# Altium PCB featherULP-2.PcbDoc
Units mm, origin at the board's own origin, x right, y up, seen from the top; angles counter-clockwise.
Board outline 50.04 x 22.86 mm, 2 copper layers (Top Layer, Bottom Layer); 20 components, 27 nets, 105 pads, 24 vias.
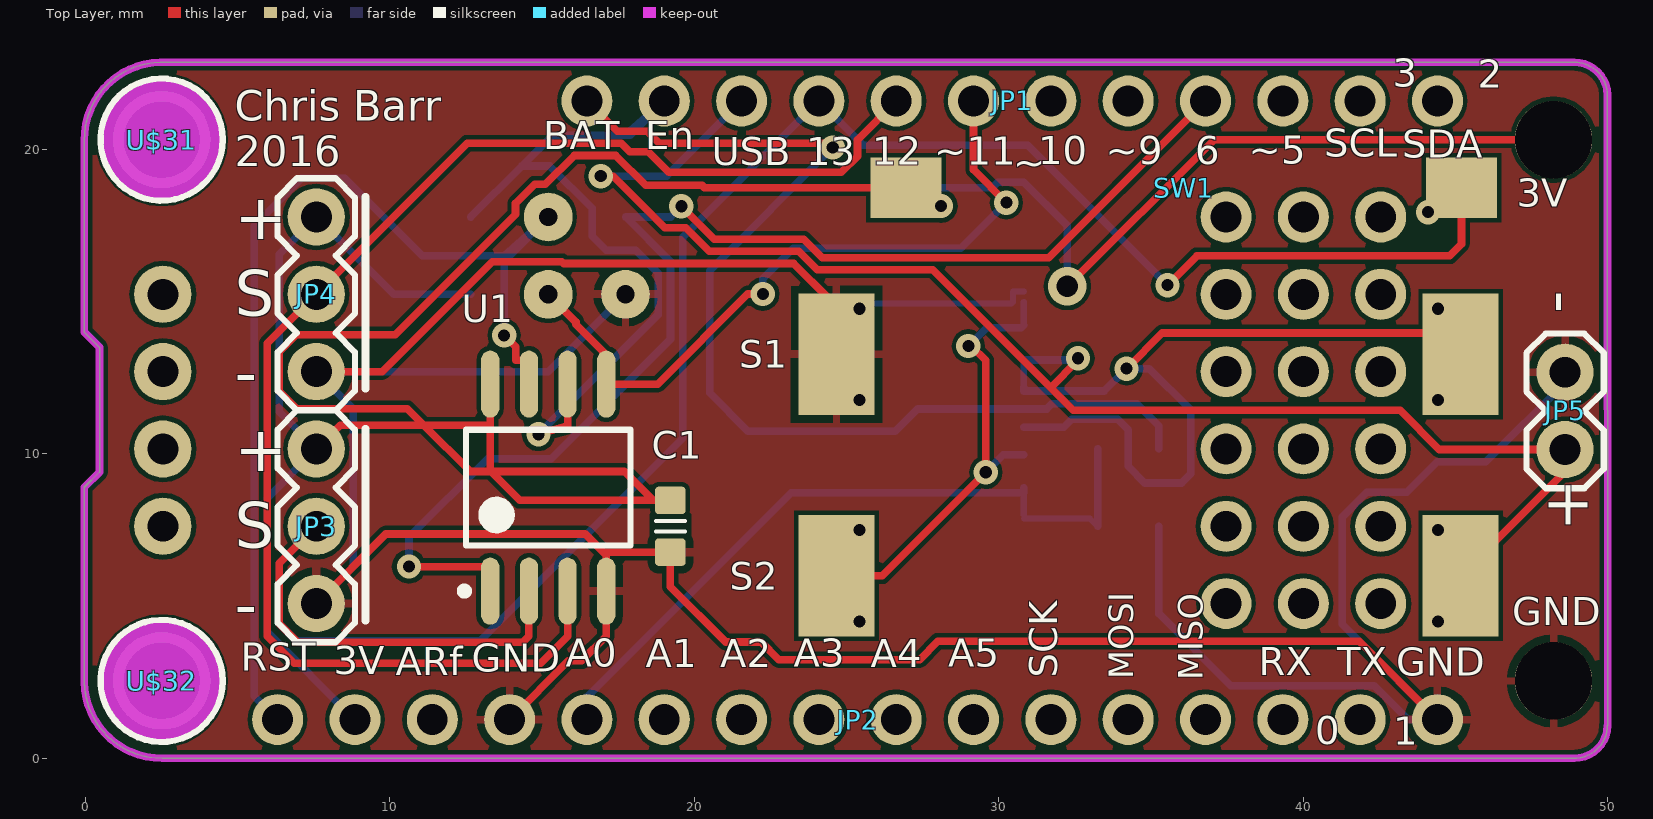
[diagram p0: Top Layer view]
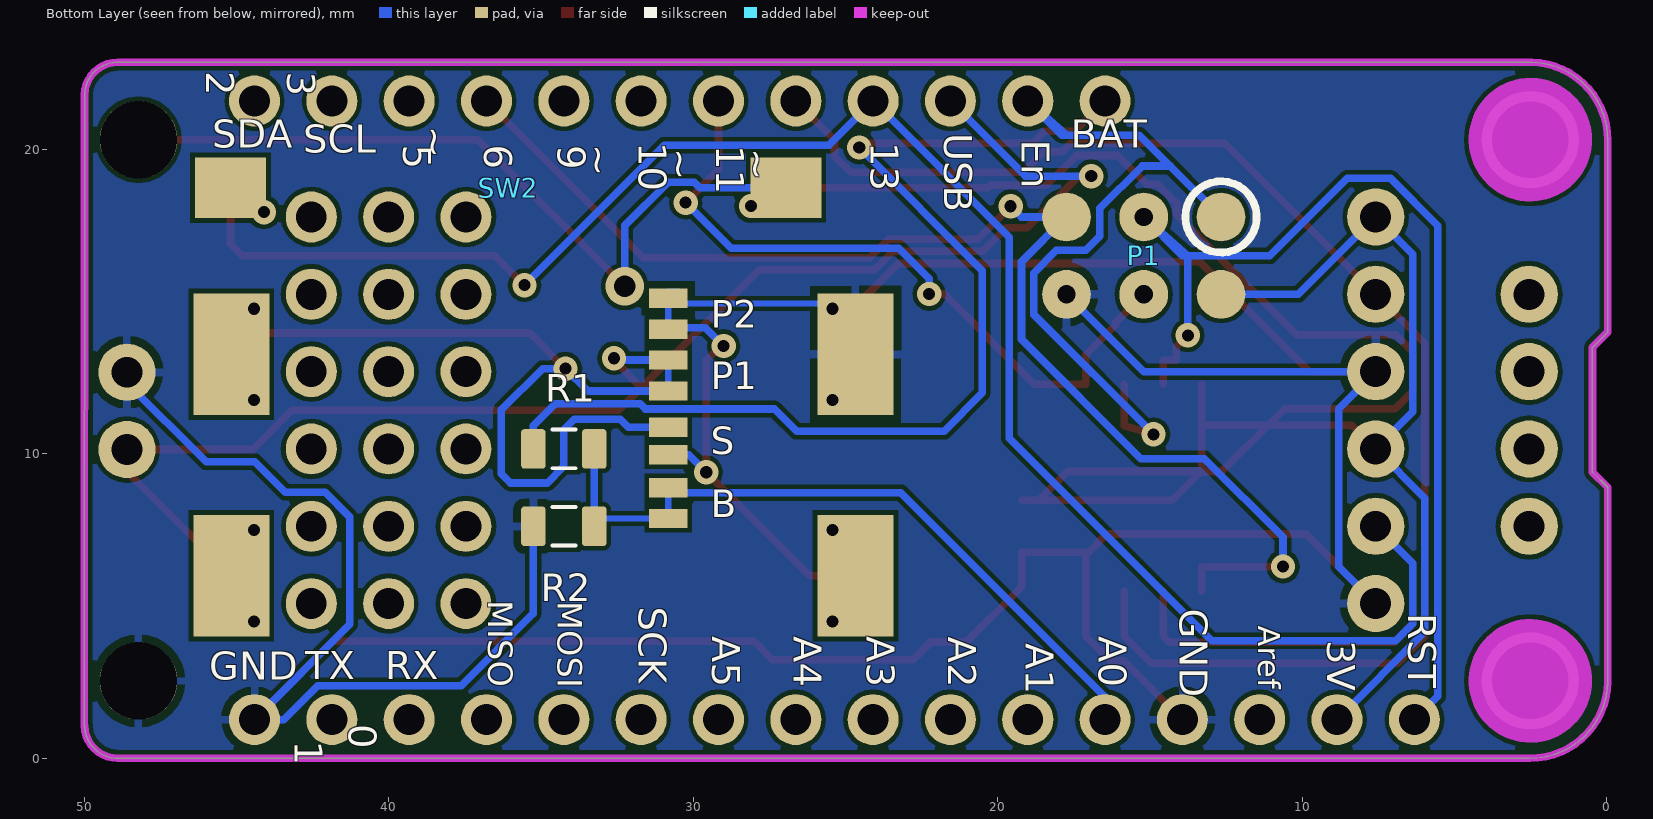
[diagram p1: Bottom Layer view, seen from below]

## Layer stack, top to bottom
Top Solder: solder mask 0.0102, Solder Resist, Dk 3.5
Top Layer: signal copper 0.0356
Dielectric1: dielectric 0.32, FR-4, Dk 4.8
Bottom Layer: signal copper 0.0356
Bottom Solder: solder mask 0.0102, Solder Resist, Dk 3.5

## Board outline
-0.04,2.501 -0.04,8.9 0.46,9.4 0.46,13.5 -0.04,14 -0.04,20.3 cw(c2.5,20.32) 2.461,22.86 48.9,22.86 cw(c48.909,21.774) 49.994,21.791 50,1.069 49.994,1.069 cw(c48.909,1.086) 48.9,0 2.52,0 cw(c2.5,2.54)

## Design rules (kind name [scope] priority, off if disabled: settings)
Clearance [All] p1: gap=0.15
FabricationTestPointUsage TestPointUsage [All] p1: valid=0 allowmultiple=FALSE
FabricationTestpoint Testpoint [All] p1: side=3 testpointundercomponent=TRUE minsize=1.016 maxsize=2.54 preferedsize=1.524 minholesize=0 maxholesize=1.016 preferedholesize=0.813 testpointgrid=0.025 allowsidetop=TRUE allowsidebottom=TRUE usegrid=TRUE gridtolerance=0
HoleSize [All] p1: absolutevalues=TRUE maxlimit=3.5 minlimit=0.025 maxpercent=80.000 minpercent=20.000
PolygonConnect [All] p1: connectstyle=Relief reliefconductorwidth=0.254 reliefentries=4 polygonreliefangle="90 Angle" airgapwidth=0.254
RoutingVias [All] p1: holewidth=0.4 width=0.8 viastyle="Through Hole" minholewidth=0.25 minwidth=0.5 maxholewidth=1 maxwidth=1.4
SilkToSolderMaskClearance SilkscreenOverComponentPads [IsPad] p1: minsilkscreentomaskgap=0.254 clearancetoexposedcopper=TRUE
SolderMaskExpansion [All] p1: expansion=0.102
Width [All] p1: maxlimit=1 minlimit=0.2 preferedwidth=0.25
26 further rules are at their usual default settings.

## Components (designator, comment, footprint, x,y, rotation, side; value= is the part's Value field where it differs from the comment)
B "JUMPER-PAD-2-NC_BY_TRACENO_SILK" PAD-JUMPER-2-NC_BY_TRACE_NO_SILK#1 30.821,8.382 r90 bottom (schematic designator BAT_MON)
C1 "approved sub OK" CAPC1608X90N 19.21,7.62 r270 top
JP1 "HEADER-1X12" 1X12_ROUND 30.44,21.59 r0 top
JP2 "HEADER-1X16ROUND" 1X16_ROUND 25.36,1.27 r180 top
JP3 "Header 3Standard 3-pin 0.1\" header. Use with straight break away headers (SKU : PRT-00116), right angle break away headers (PRT-00553), swiss pins (PRT-00743), machine pins (PRT-00117), and female headers (PRT-00115). Molex polarized connector foot print use with SKU : PRT-08232 with associated crimp pins and housings." 1X03 7.58,5.08 r90 top
JP4 "Header 3Standard 3-pin 0.1\" header. Use with straight break away headers (SKU : PRT-00116), right angle break away headers (PRT-00553), swiss pins (PRT-00743), machine pins (PRT-00117), and female headers (PRT-00115). Molex polarized connector foot print use with SKU : PRT-08232 with associated crimp pins and housings." 1X03 7.58,12.7 r90 top
JP5 "Standard 2-pin 0.1\" header. Use with  - straight break away headers ( PRT-00116) - right angle break away headers (PRT-00553) - swiss pins (PRT-00743) - machine pins (PRT-00117) - female headers (PRT-00115)   Molex polarized connector foot print use with: PRT-08233 with associated crimp pins and housings.  2.54_SCREWTERM for use with  PRT-10571.  3.5mm Screw Terminal footprints for  PRT-08084  5mm Screw Terminal footprints for use with PRT-08432" 1X02 48.6,10.14 r90 top
P1 "ICSP" "ICSP Pads - SMD" 12.66,17.78 r270 bottom
P1 "JUMPER-PAD-2-NC_BY_TRACENO_SILK" PAD-JUMPER-2-NC_BY_TRACE_NO_SILK#2 30.821,12.573 r90 bottom (schematic designator PARALLEL1)
P2 "JUMPER-PAD-2-NC_BY_TRACENO_SILK" PAD-JUMPER-2-NC_BY_TRACE_NO_SILK#2 30.821,14.605 r90 bottom (schematic designator PARALLEL2)
R1 "Thick Film" RESC2012X70N 34.25,10.16 r180 bottom
R2 "Thick Film" RESC2012X70N 34.25,7.62 r0 bottom
S "JUMPER-PAD-2-NO" PAD-JUMPER-2-NO_NO_SILK 30.821,10.414 r90 bottom (schematic designator SERIES)
S1 "Solar Cell" "SOLAR CELL IXYS  KXOB22-01X8L-ND" 45.172,13.267 r180 top
S2 "Solar Cell" "SOLAR CELL IXYS  KXOB22-01X8L-ND" 45.172,5.993 r180 top
SW1 "Reed Switch" "Reed Switch MDSM-4" 45.2,18.74 r180 top
SW2 "Reed Switch" "Reed Switch MDSM-4" 45.2,18.74 r180 bottom
U1 "ATtiny45-20SH" 8S2_N 15.2,8.89 r90 top
U$31 "MOUNTINGHOLE2.5" MOUNTINGHOLE_2.5_PLATED 2.5,20.32 r270 top
U$32 "MOUNTINGHOLE2.5" MOUNTINGHOLE_2.5_PLATED 2.5,2.54 r270 top

## Footprints (in the part's own frame and the unit in brackets; to place one, negate y for a bottom-side part, rotate by r counter-clockwise, add the part's x,y. Pads: shape width x height; smd on the part's side, far side on the other; paste and mask are expansions set on the pad)
1X02 [mil]
  round 74 hole 40: 1(0,0) 2(100,0)
  silkscreen extent -50,-50 150,50
1X03 [mil]
  round 74 hole 40: 1(0,0) 2(100,0) 3(200,0)
  silkscreen extent -50,-50 250,50
1X12_ROUND [mil] "1X12_ROUND"
  round 66 hole 40: 1(-550,0) 2(-450,0) 3(-350,0) 4(-250,0) 5(-150,0) 6(-50,0) 7(50,0) 8(150,0) 9(250,0) 10(350,0) 11(450,0) 12(550,0)
1X16_ROUND [mil] "1X16_ROUND"
  round 66 hole 40: 1(-750,0) 2(-650,0) 3(-550,0) 4(-450,0) 5(-350,0) 6(-250,0) 7(-150,0) 8(-50,0) 9(50,0) 10(150,0) 11(250,0) 12(350,0) 13(450,0) 14(550,0) 15(650,0) 16(750,0)
8S2_N [mm] "SOP, 8-Leads, Body 5.3x5.3mm, Pitch 1.27mm, IPC Medium Density"
  oval 2.2x0.6 smd: 1(-3.4,1.905) 2(-3.4,0.635) 3(-3.4,-0.635) 4(-3.4,-1.905) 5(3.4,-1.905) 6(3.4,-0.635) 7(3.4,0.635) 8(3.4,1.905)
  silkscreen extent -3.52,-2.7 1.9,2.88, body extent -2.7,-2.68 2.7,2.68, height 2.16
CAPC1608X90N [mm] "Chip Capacitor, Body 1.6x0.8mm, EIA 0603, IPC Medium Density"
  round 0.254 on Mech15: 0(0,0)
  rrect25% 0.9x1 smd: 1(-0.85,0) 2(0.85,0)
  Top Layer pour cut-out: -0.6,0.5 -0.4,0.7 0.4,0.7 0.6,0.5 0.6,-0.5 0.4,-0.7 -0.4,-0.7 -0.6,-0.5
  silkscreen extent -0.18,-0.48 0.18,0.48, body extent -0.85,-0.45 0.85,0.45, height 0.89
"ICSP Pads - SMD" [mm]
  round 1.6 smd: 1(0,0) 2(2.54,0) 5(0,-5.08)
  round 1.6 hole 0.6: 3(0,-2.54) 4(2.54,-2.54) 6(2.54,-5.08)
  silkscreen extent -1.17,-1.17 1.17,1.17
MOUNTINGHOLE_2.5_PLATED [mil] "MOUNTINGHOLE_2.5_PLATED"
  round 126 hole 99: P$1(0,0)
  Top Layer keep-out circle w80: c0,0 r40
  Bottom Layer keep-out circle w80: c0,0 r40
  silkscreen extent -79,-79 79,79
PAD-JUMPER-2-NC_BY_TRACE_NO_SILK#1 [mil]
  rect 25x50 smd: 1(-20,0) 2(20,0)
  Top Layer lines w8: -15,0 13.3,0 15,0
PAD-JUMPER-2-NC_BY_TRACE_NO_SILK#2 [mil]
  rect 25x50 smd: 1(-20,0) 2(20,0)
  Top Layer lines w8: -15,0 15,0
PAD-JUMPER-2-NO_NO_SILK [mm]
  rect 0.635x1.27 smd: 1(-0.45,0) 2(0.457,0)
"Reed Switch MDSM-4" [mm]
  rect 2.34x2 smd: 0(0,0) 1(18.25,0)
RESC2012X70N [mm] "Chip Resistor, Body 2.0x1.2mm, EIA 0805, IPC Medium Density"
  round 0.254 on Mech15: 0(0,0)
  rrect25% 0.8x1.3 smd: 1(-1,0) 2(1,0)
  Top Layer pour cut-out: -0.725,0.65 -0.525,0.85 0.525,0.85 0.725,0.65 0.725,-0.65 0.525,-0.85 -0.525,-0.85 -0.725,-0.65
  silkscreen extent -0.38,-0.64 0.38,0.64, body extent -1.1,-0.67 1.1,0.68, height 0.69
"SOLAR CELL IXYS  KXOB22-01X8L-ND" [mm]
  rect 2.5x4 smd far side: +(0,0) -(20.5,0)
  rect 2.5x4 smd: +(0,0) -(20.5,0)
  body extent -0.75,-3.5 21.25,3.5, height 1.5

## Part data
C1: library part CAPC_100n_0603_X7R_50V_10%, "Capacitor SMD Cer 100nF 10% 50V X7R 0603"
JP2: "PIN HEADER"
JP3 JP4: library part M03PTH
JP5: library part M02PTH
P1: library part "Header 3X2", "Header, 3-Pin, Dual row"
R1: library part RES_1M_0805_5%, "Resistor SMD chip 1M Ohm 0.125W 5% 0805"
R2: library part RES_205K_0805_1%, "Resistor SMD chip 205k Ohm 0.125W 1% 0805"
U1: "8-bit AVR Microcontroller, 20MHz, 2.7-5.5V, 4K Flash, 256 Bytes EEPROM, 256 Bytes SRAM, Industrial Grade (-40°C to 85°C), 8-Lead SOIC, Pb-Free"
U$31 U$32: "Mounting Hole   For #2 screws (0.086\"/2.18mm width, 0.094\"/2.4mm hole) use 2.5mm"

## Free pads (board coordinates)
  round 2.54 hole 2.54: 1(48.22,2.54) 1(48.22,20.32)
  round 1.88 hole 1.016: ""(2.54,7.62) ""(2.54,10.16) ""(2.54,12.7) ""(2.54,15.24)
  round 1.676 hole 1.016: ""(37.465,5.08) ""(37.465,7.62) ""(37.465,10.16) ""(37.465,12.7) ""(37.465,15.24) ""(37.465,17.78) ""(40.005,5.08) ""(40.005,7.62) ""(40.005,10.16) ""(40.005,12.7) ""(40.005,15.24) ""(40.005,17.78) ""(42.545,5.08) ""(42.545,7.62) ""(42.545,10.16) ""(42.545,12.7) ""(42.545,15.24) ""(42.545,17.78)

## Via types
v1: diameter 0.8, hole 0.4, Top Layer to Bottom Layer, tented both sides, 21 vias
v2: diameter 0.8, hole 0.4, Top Layer to Bottom Layer, 2 vias
v3: diameter 1.27, hole 0.711, Top Layer to Bottom Layer, 1 vias

## Nets (pads, with @x,y where several pads share a name; then routed paths per layer and width w, separated by ;. In a path a pad name is that pad's centre, name@x,y a point inside that pad or via, vN(x,y) a via of type N, cw(c..) or ccw(c..) an arc to the next point about the centre after c; other vN are vias at no path point)
0: JP2.3
1: JP2.2
2: JP1.12
3: JP1.11
5: JP1.10
6: JP1.9 P1.5 U1.1 | length 42.4
  Top Layer w0.25: v1(10.625,6.296) 13.295,6.296 U1.1 ; v1(19.572,18.132) 20.654,17.05 23.59,17.05 24.2,16.44 31.64,16.44 JP1.9
  Bottom Layer w0.25: v1(10.625,6.296) 10.625,7.261 13.207,9.843 15.293,9.843 19.215,13.765 19.215,16.305 P1.5 19.22,17.78 v1(19.572,18.132)
9: JP1.8
10: JP1.7
11: JP1.6 P1.4 U1.5 | length 23.4
  Top Layer w0.25: P1.4 16.111,14.329 16.111,14.25 17.105,13.256 U1.5 18.79,12.29 21.75,15.25 v2(22.25,15.25) ; JP1.6 29.17,19.33 v2(30.25,18.25)
  Bottom Layer w0.25: v2(22.25,15.25) 22.25,15.75 23.25,16.75 28.75,16.75 v2(30.25,18.25)
12: JP1.5 JP4.2 U1.3 | length 46.8
  Top Layer w0.25: U1.3 15.835,4.01 14.946,3.121 6.854,3.121 5.965,4.01 5.965,13.625 JP4.2 12.538,20.198 17.602,20.198 17.873,19.927 18.48,19.927 19.165,19.243 24.823,19.243 25.36,19.779 25.36,20.32 JP1.5
13: JP1.4 JP3.2 SW1.0 SW2.0 U1.2 | length 72.6
  Top Layer w0.25: JP3.2 6.365,6.405 6.365,4.416 6.975,3.807 14.362,3.807 14.565,4.01 U1.2 ; v1(35.542,15.542) 36.511,16.51 44.816,16.51 45.2,16.894 SW1.0
  Bottom Layer w0.25: JP3.2 6.365,6.405 6.365,4.416 6.916,3.865 12.968,3.865 19.615,10.512 19.615,17.115 JP1.4 25.54,20.14 30.944,20.14 v1(35.542,15.542)
  other v1: 44.1,17.94
+3V3: C1.1 JP2.15 JP3.3 JP4.3 P1.2@12.66,15.24 pad.1@48.22,20.32 SW1.1 SW2.1 U1.8 | length 105.6
  Top Layer w0.25: JP3.3 8.364,10.944 11.107,10.944 ; U1.8 13.295,10.944 ; C1.1 18.651,8.47 ; SW1.1 20.33,18.74 20.251,18.818 18.397,18.818 17.417,19.798 16.048,19.798 15.105,18.855 14.755,18.855 14.125,18.225 14.125,17.875 10.166,13.916 6.924,13.916 6.365,13.357 6.365,12.054 6.942,11.478 10.574,11.478 11.107,10.944 ; v3(32.25,15.5) 37.07,20.32 pad.1@48.22,20.32 ; 11.107,10.944 13.295,10.944 ; 11.107,10.944 12.631,9.42 13.295,9.42 ; 13.295,9.42 13.295,9.432 ; 13.295,9.42 13.307,9.42 ; 13.295,9.432 13.295,10.944 ; 13.295,9.432 13.307,9.42 ; 13.307,9.42 14.257,8.47 18.651,8.47 ; 13.307,9.42 17.701,9.42 18.651,8.47
  Bottom Layer w0.25: JP2.15 5.965,4.155 5.965,8.545 JP3.3 6.358,11.382 6.358,16.558 JP4.3 10.12,15.24 P1.2@12.66,15.24 ; SW2.1 29.785,18.74 29.97,18.925 30.825,18.925 32.25,17.5 v3(32.25,15.5)
  other v1: 28.1,18.14
A0: B.2 JP2.12 | length 18
  Bottom Layer w0.25: JP2.12 16.47,2.01 23.18,8.72 30.821,8.72 30.821,8.763 B.2
A1: JP2.11
A2: JP2.10
A3: JP2.9
A4: JP2.8
A5: JP2.7
AREF: JP2.14
EN: JP1.2 P1.1@12.66,17.78 U1.6 | length 25.4
  Top Layer w0.25: v1(14.878,10.639) 15.835,10.919 U1.6
  Bottom Layer w0.25: P1.1@12.66,17.78 14.333,19.453 ; v1(14.878,10.639) 18.815,14.576 18.815,15.937 18.067,16.685 17.102,16.685 16.645,17.142 16.645,18.064 15.255,19.453 14.333,19.453 ; 14.333,19.453 15.349,20.469 17.734,20.469 ; 17.734,20.469 17.889,20.469 JP1.2 17.734,20.469
ESP_RST: JP2.16 P1.3 U1.7 | length 35.2
  Top Layer w0.25: v1(13.749,13.891) 14.13,13.51 14.13,13.078 14.565,13.078 U1.7
  Bottom Layer w0.25: JP2.16 5.545,2.035 5.545,17.497 7.094,19.047 8.517,19.047 11.057,16.507 13.749,16.507 ; v1(13.749,13.891) 13.749,16.507 ; 13.749,16.507 13.927,16.507 P1.3 13.749,16.507
GND: C1.2 JP2.1 JP2.13 JP3.1 JP4.1 JP5.2 P1.6 P2.2 pad.1@48.22,2.54 R2.2 S1.- U1.4 | length 123.7
  Top Layer w0.25: JP3.1 9.866,7.366 16.413,7.366 17.105,6.674 ; JP4.1 9.739,12.7 13.354,16.315 15.645,16.315 15.71,16.25 23.259,16.25 S1.-@24.407,15.102 ; JP2.13 15.857,3.197 16.292,3.197 17.105,4.01 U1.4 17.105,6.674 ; JP2.1 41.84,3.84 28,3.84 27.4,3.24 22.778,3.24 22.2,3.818 21.028,3.818 19.21,5.636 C1.2 17.105,6.77 17.105,6.674
  Bottom Layer w0.2: S1.-@25.6,14.94 30.423,14.94 30.469,14.986 30.469,15.338 P2.2@30.821,15.338
  Bottom Layer w0.25: JP3.1 8.796,6.296 8.796,11.484 JP4.1 15.2,12.7 P1.6 ; R2.2 35.25,4.755 37.622,2.383 42.331,2.383 43.444,1.27 JP2.1 41.275,4.405 41.275,7.924 42.084,8.733 43.393,8.733 44.4,9.74 46,9.74 48.6,12.34 JP5.2
  other v1: 25.422,11.767 25.422,14.767
NetBAT_MON_1: B.1 R1.2 R2.1 | length 5.1
  Bottom Layer w0.2: B.1 32.996,7.874 R2.1
  Bottom Layer w0.25: R2.1 R1.2
NetPARALLEL1_1: P1.1@30.821,12.065 S1.+ S.2 | length 27.7
  Top Layer w0.25: v1(34.196,12.798) 35.368,13.97 44.435,13.97 45.172,13.233 S1.+@45.172,13.267
  Bottom Layer w0.25: S.2 32.131,10.871 32.4,11.14 33.9,11.14 34.25,10.79 34.25,9.59 34.8,9.04 36,9.04 36.3,9.34 36.3,11.44 34.942,12.798 v1(34.196,12.798) 33.463,12.065 30.821,12.065 P1.1@30.821,12.192
  other v1: 44.422,11.767 44.422,14.767
NetPARALLEL2_1: P2.1 S2.- S.1 | length 14.3
  Top Layer w0.25: S2.-@24.672,5.993 26.171,5.993 v1(29.573,9.395) 29.573,13.067 29.1,13.54 v1(29,13.54)
  Bottom Layer w0.25: v1(29,13.54) 29.6,14.14 30.737,14.14 P2.1@30.821,14.224 ; v1(29.573,9.395) 30.142,9.964 S.1
  other v1: 25.422,4.493 25.422,7.493
VBAT: JP1.1 R1.1 | length 35.1
  Top Layer w0.25: JP1.1 17.462,20.598 18.451,20.598 18.844,20.205 24.402,20.205 v1(24.544,20.063)
  Bottom Layer w0.25: v1(24.544,20.063) 20.5,16.019 20.5,12 21.76,10.74 26.6,10.74 27.333,11.473 31.57,11.473 31.737,11.64 34.529,11.64 35.25,10.919 R1.1
VBUS: JP1.3 JP5.1 P1.2@30.821,13.081 S2.+ | length 49.8
  Top Layer w0.25: v1(16.924,19.123) 17.33,19.123 19.032,17.421 19.717,17.421 20.489,16.65 23.424,16.65 24.034,16.04 27.83,16.04 31.7,12.17 ; v1@32.541,13.081 v1(32.6,13.14) 32.6,13.07 31.7,12.17 ; S2.+@45.172,5.993 48.6,9.421 JP5.1 44.47,10.14 43.18,11.43 32.44,11.43 31.7,12.17
  Bottom Layer w0.25: v1(16.924,19.123) 19.083,19.123 JP1.3 ; P1.2@30.821,13.081 v1@32.541,13.081
  other v1: 44.422,4.493 44.422,7.493
pads on no net: C1.0 JP2.4 JP2.5 JP2.6 R1.0 R2.0 U$31.P$1 U$32.P$1

## Polygon pours and split planes (outlines as drawn)
GND on Bottom Layer "Bottom Layer-GND" (solid, pour order 0): -0.04,22.86 -0.04,0 49.994,0 49.994,22.86
GND on Top Layer "Bottom Layer-GND" (solid, pour order 2): -0.04,22.86 -0.04,0 49.994,0 49.994,22.86

## Keep-outs
Keep-Out Layer:
  lines w0.254: 2.461,22.86 ccw(c2.5,20.32) -0.04,20.3 -0.04,14 0.46,13.5 0.46,9.4 -0.04,8.9 -0.04,2.501 ccw(c2.5,2.54) 2.52,0 48.9,0 ccw(c48.909,1.086) 49.994,1.069 ; 2.461,22.86 48.9,22.86 cw(c48.909,21.774) 49.994,21.791 50,1.069

## Silkscreen, mask and mechanical layers (free items; w line width, h text height)
Top Overlay:
  lines w0.254: 9.2,4.52 9.2,10.82 ; 9.2,12.14 9.2,18.44
  text "3" at 42.937,21.745 h1.57
  text "2" at 45.727,21.719 h1.57
  text "BAT" at 15.042,19.689 h1.57
  text "En" at 18.381,19.689 h1.57
  text "SCL" at 40.685,19.452 h1.57
  text "Chris Barr / 2016" at 4.9,19.44 h1
  text "SDA" at 43.249,19.418 h1.57
  text "~5" at 38.205,19.213 h1.57
  text "10" at 31.292,19.205 h1.57
  text "~9" at 33.509,19.205 h1.57
  text "6" at 36.457,19.205 h1.57
  text "USB" at 20.576,19.164 h1.57
  text "13" at 23.67,19.171 h1.57
  text "12" at 25.835,19.179 h1.57
  text "~11" at 27.882,19.179 h1.57
  text "~" at 30.47,18.807 h1.57
  text "3V" at 47.013,17.808 h1.57
  text "+" at 4.9,17.04 h1.5
  text "-" at 47.84,15.36 h1.5 r270
  text "S" at 4.9,14.54 h1.5
  text "-" at 4.9,11.94 h1.5
  text "+" at 4.9,9.42 h1.5
  text "+" at 49.34,7.46 h1.5 r90
  text "S" at 4.9,6.92 h1.5
  text "-" at 4.9,4.32 h1.5
  text "GND" at 46.857,4.051 h1.57
  text "A0" at 15.767,2.695 h1.57
  text "A3" at 23.258,2.695 h1.57
  text "A5" at 28.334,2.697 h1.57
  text "A1" at 18.402,2.669 h1.57
  text "A2" at 20.851,2.669 h1.57
  text "A4" at 25.8,2.671 h1.57
  text "SCK" at 32.231,2.65 h1.57 r90
  text "MOSI" at 34.677,2.59 h1.38 r90
  text "RST" at 5.099,2.561 h1.57
  text "MISO" at 36.963,2.562 h1.38 r90
  text "GND" at 12.694,2.527 h1.57
  text "3V" at 8.151,2.441 h1.57
  text "ARf" at 10.189,2.409 h1.57
  text "RX" at 38.54,2.417 h1.57
  text "TX" at 41.12,2.417 h1.57
  text "GND" at 43.047,2.4 h1.57
  text "0" at 40.399,0.155 h1.57
  text "1" at 42.955,0.129 h1.57
Bottom Overlay:
  text "3" at 43.654,22.555 h1.57 r90
  text "2" at 46.313,22.559 h1.57 r90
  text "USB" at 22.071,20.532 h1.57 r90
  text "En" at 19.514,20.314 h1.57 r90
  text "13" at 24.477,20.232 h1.57 r90
  text "10" at 32.097,20.23 h1.57 r90
  text "~" at 33.855,20.163 h1.57 r90
  text "11" at 29.549,20.135 h1.57 r90
  text "9" at 34.764,20.143 h1.57 r90
  text "6" at 37.177,20.145 h1.57 r90
  text "5" at 39.836,20.146 h1.57 r90
  text "~" at 28.648,20.036 h1.57 r90
  text "~" at 31.188,20.036 h1.57 r90
  text "BAT" at 17.6,19.74 h1.57
  text "SDA" at 45.8,19.74 h1.57
  text "~" at 37.82,19.715 h1.57 r270
  text "SCL" at 42.801,19.579 h1.57
  text "MISO" at 36.992,5.185 h1.38 r90
  text "MOSI" at 34.706,5.157 h1.38 r90
  text "SCK" at 32.104,4.97 h1.57 r90
  text "GND" at 14.324,4.919 h1.57 r90
  text "RST" at 6.831,4.767 h1.57 r90
  text "Aref" at 11.679,4.355 h1.26 r90
  text "A0" at 16.984,4.003 h1.57 r90
  text "A2" at 21.929,3.999 h1.57 r90
  text "A3" at 24.604,4.004 h1.57 r90
  text "A4" at 27.007,4.002 h1.57 r90
  text "A5" at 29.682,4.008 h1.57 r90
  text "3V" at 9.491,3.874 h1.57 r90
  text "A1" at 19.389,3.78 h1.57 r90
  text "RX" at 40.12,2.29 h1.57
  text "TX" at 42.747,2.29 h1.57
  text "GND" at 45.9,2.273 h1.57
  text "1" at 43.392,0.566 h1.57 r90
  text "0" at 40.086,0.307 h1.57 r270
Mechanical 4:
  lines w0.254: 9.75,2.5 9.75,20.5 46,20.5 46,2.5 9.75,2.5
Mechanical 16:
  drawing of 1877 lines, arcs and shapes, not listed
  text "1" at -94.785,84.909 h1.78
  text "2" at -22.141,84.909 h1.78
  text "3" at 51.011,84.909 h1.78
  text "4" at 123.909,84.909 h1.78
  text "A" at -129.126,61.897 h1.78
  text "A" at 157.894,61.897 h1.78
  text "B" at -129.126,13.84 h1.78
  text "B" at 157.894,13.84 h1.78
  text "C" at -129.126,-34.674 h1.78
  text "C" at 157.894,-34.674 h1.78
  text "ENGINEER:" at 42.959,-71.682 h1.14
  text "TITLE:" at 81.059,-71.682 h1.14
  text "PCB DESIGNER:" at 42.959,-79.175 h1.14
  text "D" at -129.126,-82.68 h1.78
  text "D" at 157.894,-82.68 h1.78
  text "DATE:" at 42.959,-86.922 h1.14
  text "PART NO.:" at 81.059,-86.922 h1.14
  text "REV:" at 134.399,-86.922 h1.14
  text "Altium Limited" at 9.939,-89.462 h1.78
  text ".PRINT_DATE" at 44.229,-89.97 h1.78
  text "12a Rodborough Rd" at 9.939,-92.002 h1.78
  text "Frenchs Forest" at 9.939,-94.542 h1.78
  text "FILE NAME:" at 42.959,-94.542 h1.14
  text "DWG NO:" at 81.059,-94.542 h1.14
  text "SCALE:" at 134.399,-94.542 h1.14
  text "NSW 2086" at 9.939,-97.082 h1.78
  text ".PCB_FILE_NAME_NO_PATH" at 44.229,-97.59 h1.78
  text "1" at -94.785,-103.051 h1.78
  text "2" at -22.141,-103.051 h1.78
  text "3" at 51.011,-103.051 h1.78
  text "4" at 123.909,-103.051 h1.78

## Dimensions
9.75,20.5 to 46,20.5 on Mechanical 4
9.75,20.5 to 9.75,2.5 on Mechanical 4
46.95,2.616 to 49.566,2.54 on Mechanical 12
4.405,22.86 to 4.735,0 on Mechanical 12
2.5,20.32 to 2.5,2.54 on Mechanical 12
2.5,20.32 to 48.22,20.32 on Mechanical 12
-0.04,20.3 to 49.994,21.791 on Mechanical 12